# Altium PCB pcb_4_layer.PcbDoc
Units mil, origin at the board's own origin, x right, y up, seen from the top; angles counter-clockwise.
Board outline 1900 x 2500 mil, 4 copper layers (Top Layer, Mid Layer 1, Mid Layer 2, Bottom Layer), stack 61.811 mil thick; 45 components, 35 nets, 200 pads, 30 vias.
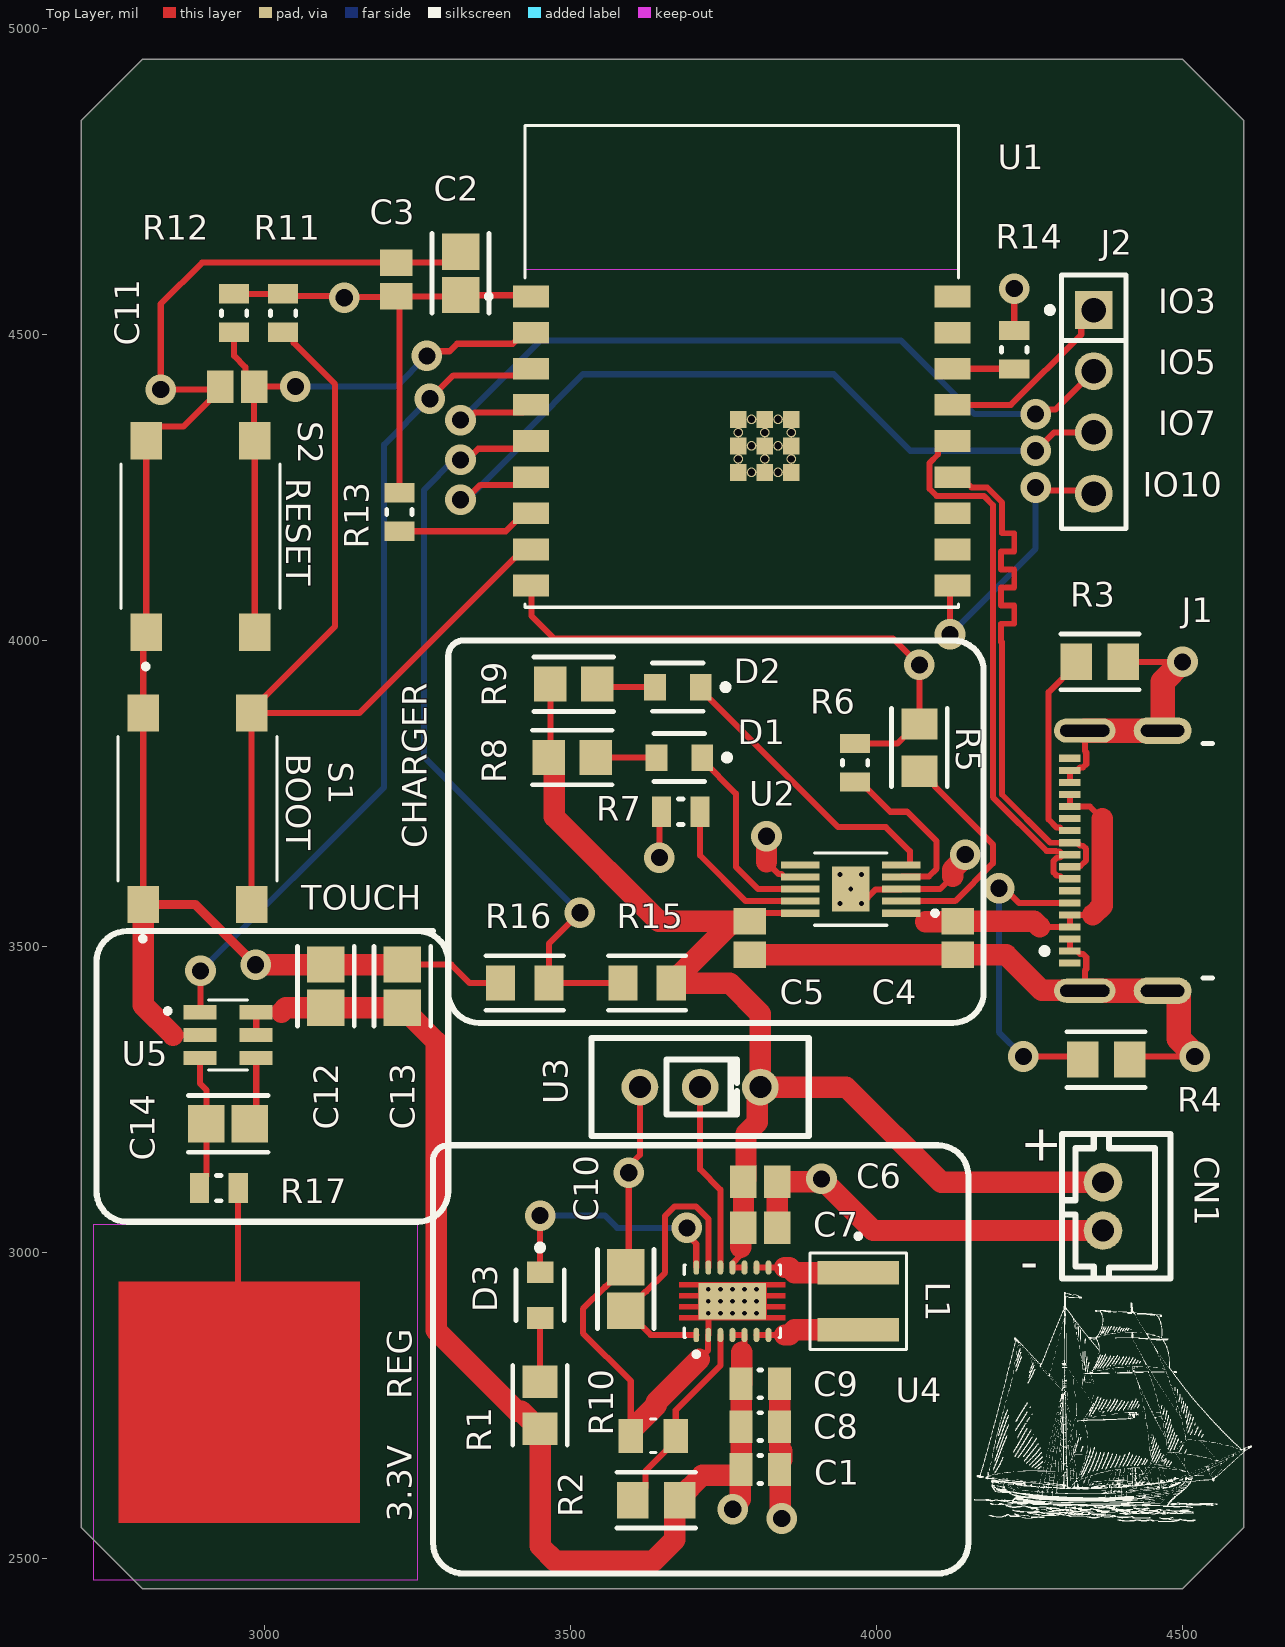
[diagram p0: Top Layer view]
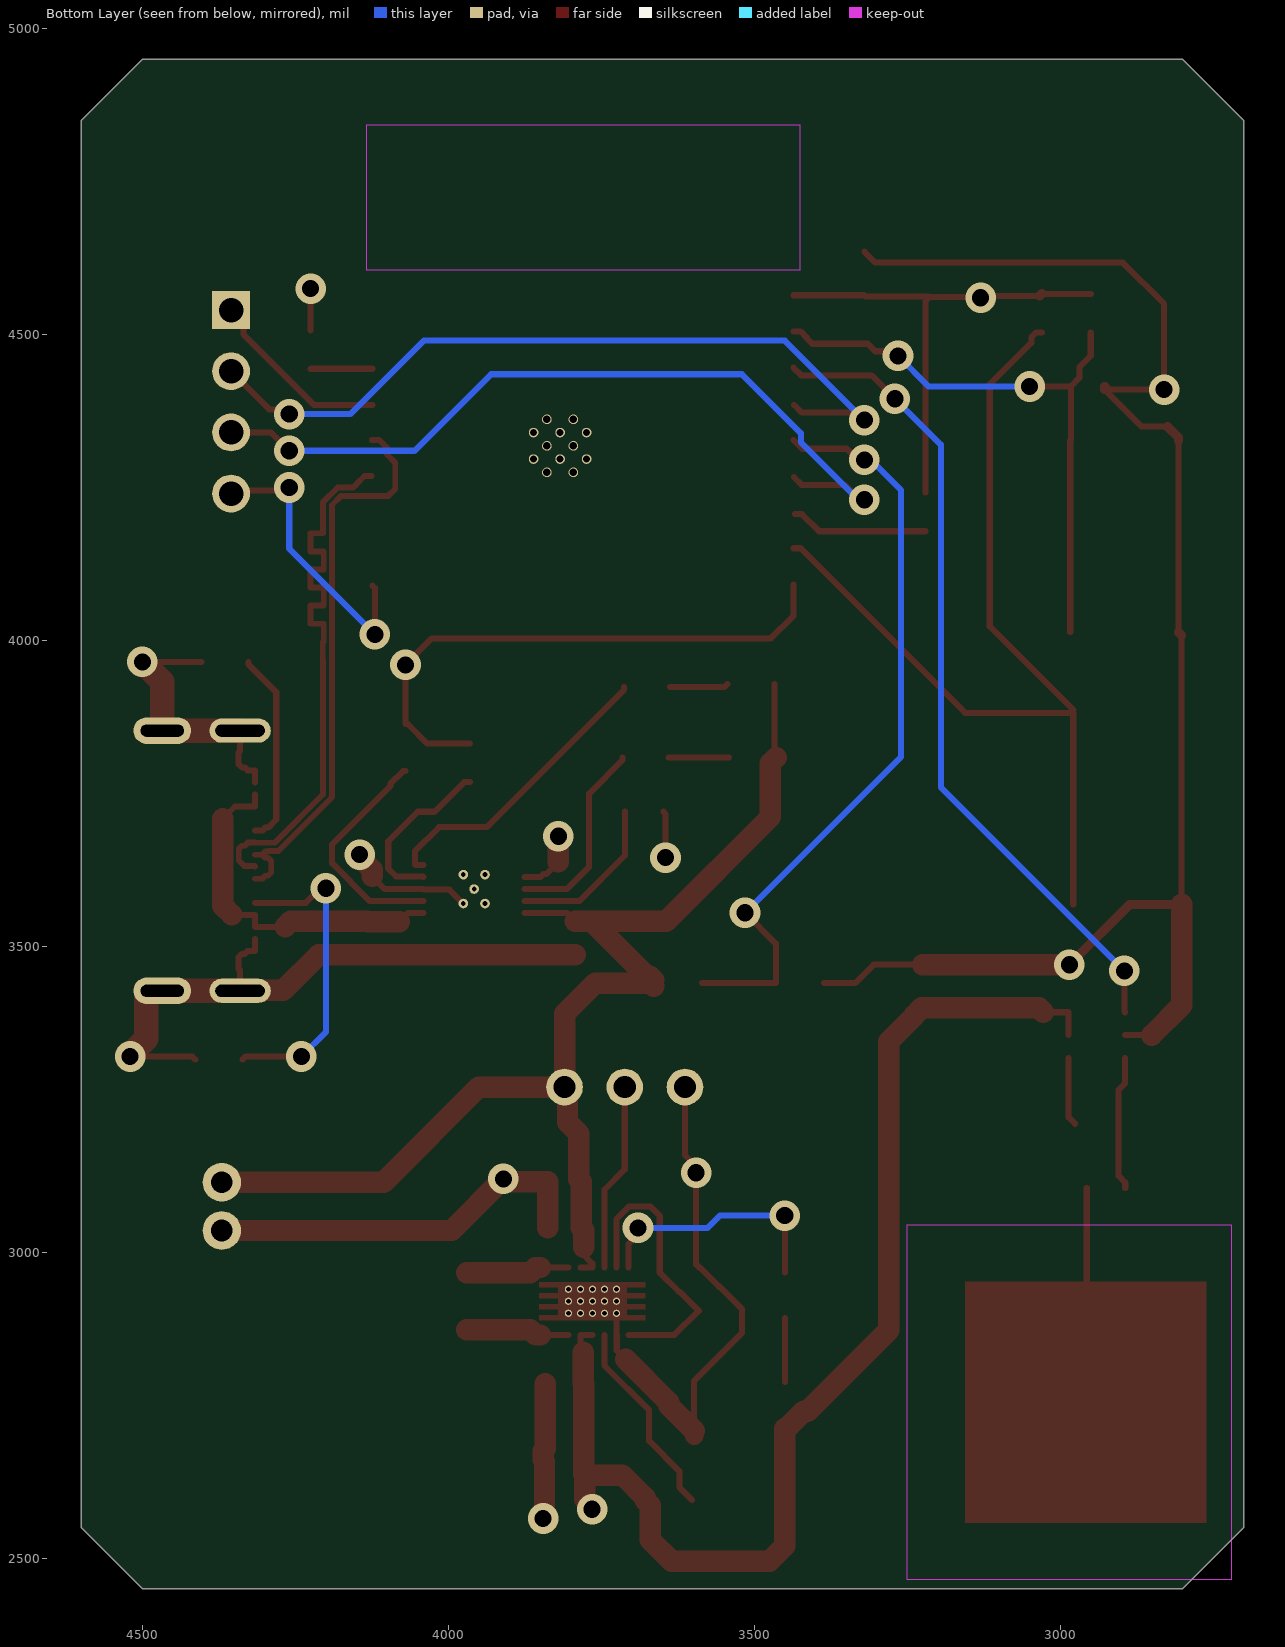
[diagram p1: Bottom Layer view, seen from below]
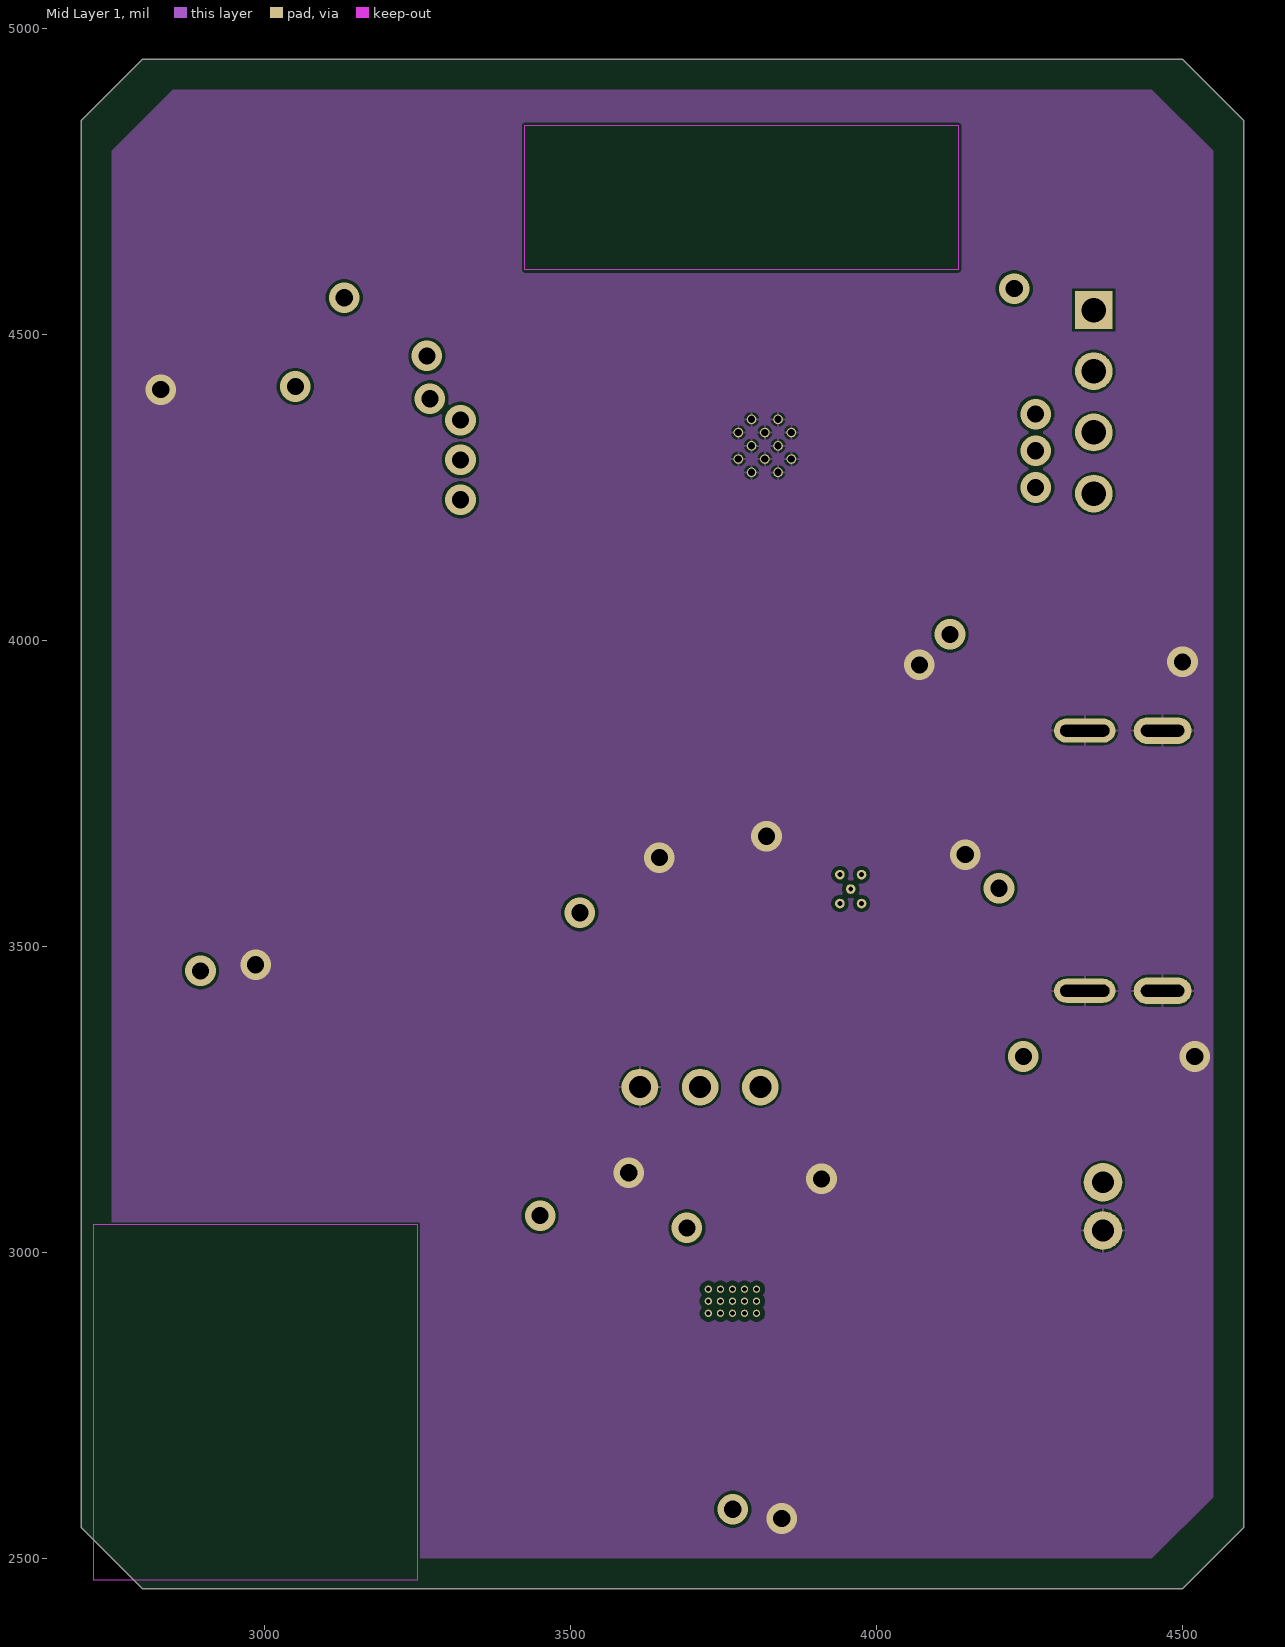
[diagram p2: Mid Layer 1]
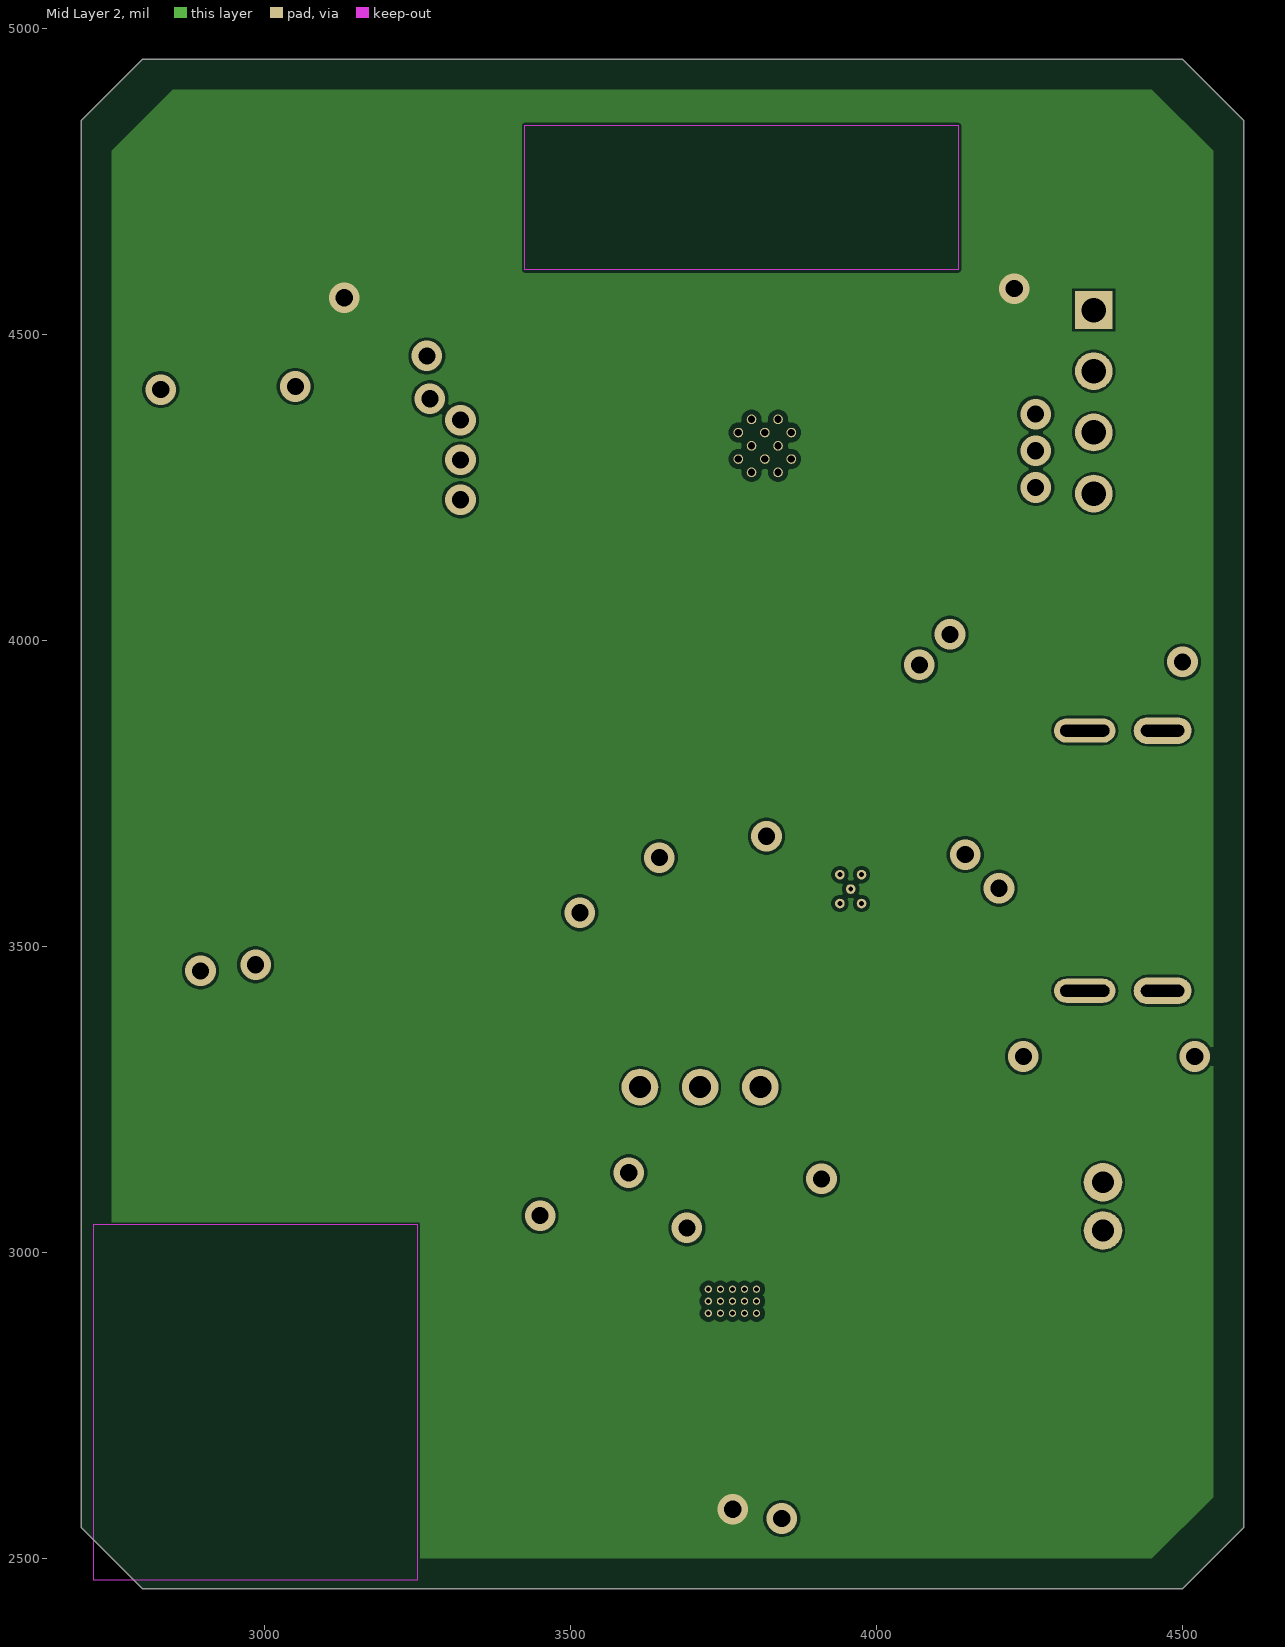
[diagram p3: Mid Layer 2]
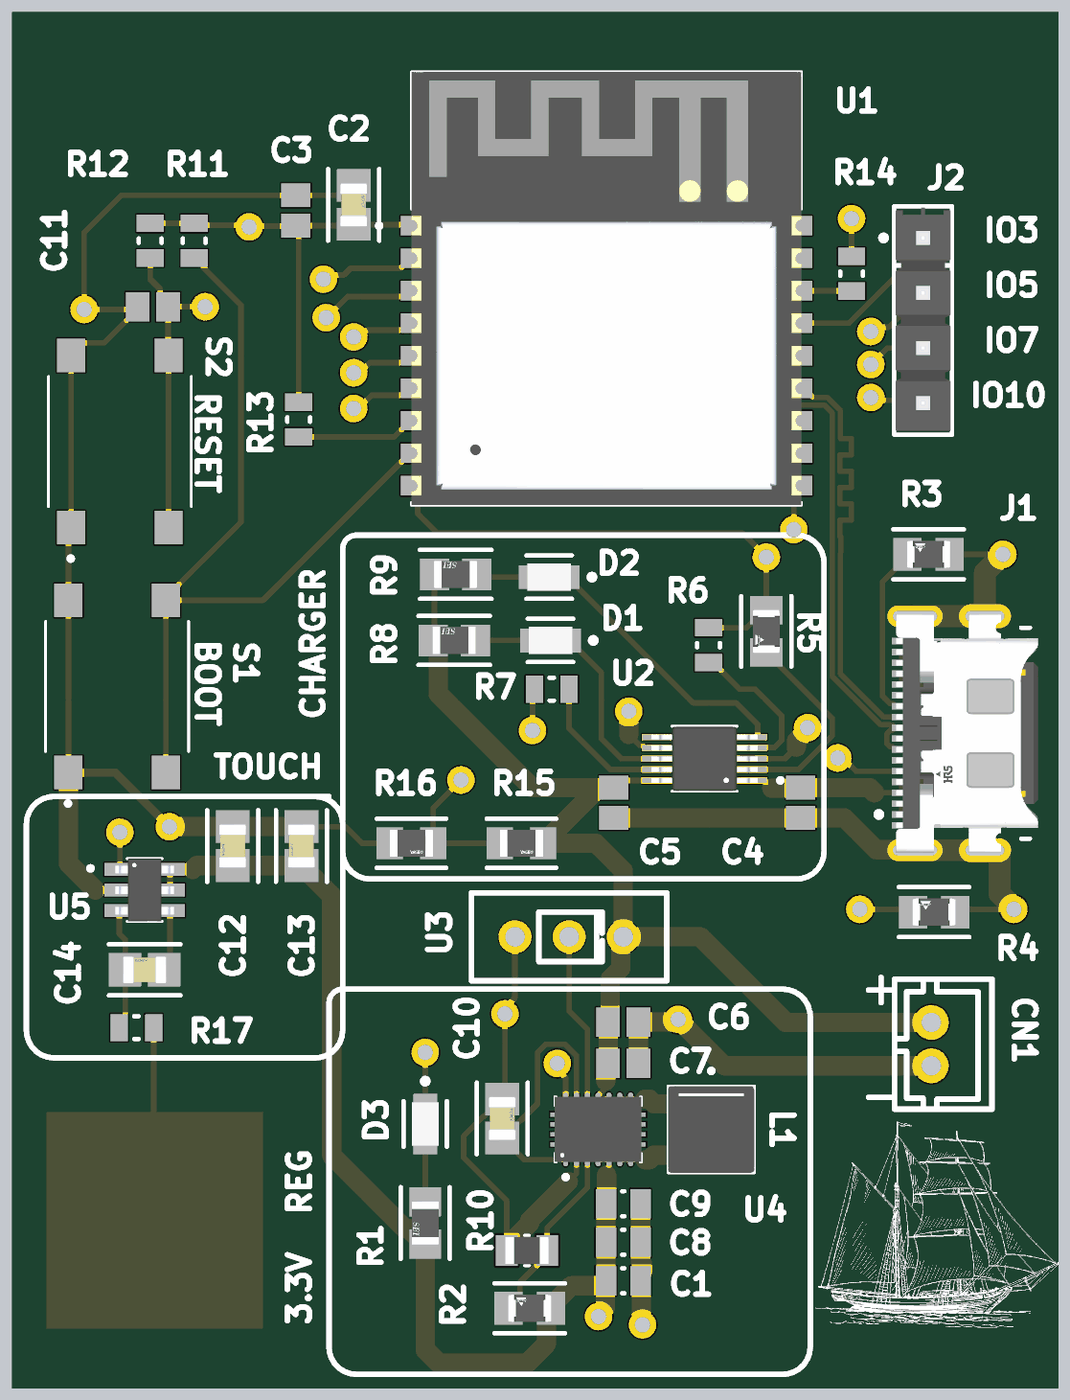
[diagram p4: 3D render of the assembled board from above, using the file's embedded part models]

## Layer stack, top to bottom
Top Solder: solder mask 0.5, Solder Resist, Dk 3.8
Top Layer: signal copper 1.378
Dielectric 1: prepreg 7.874, 7628, Dk 4.6
Mid Layer 1: signal copper 0.689
Core: core 41.9291, FR-4, Dk 4.5
Mid Layer 2: signal copper 0.689
Dielectric 2: prepreg 7.874, 7628, Dk 4.6
Bottom Layer: signal copper 1.378
Bottom Solder: solder mask 0.5, Solder Resist, Dk 3.8

## Board outline
4600,2550 4500,2450 2800,2450 2700,2550 2700,4850 2800,4950 4500,4950 4600,4850

## Design rules (kind name [scope] priority, off if disabled: settings)
BoardOutlineClearance [All] p1: gap=7.87 ignorepadtopadclearanceinfootprint=FALSE
Clearance [All] p1: gap=4 ignorepadtopadclearanceinfootprint=FALSE except(5: Arc-Via Track-Via SMDPad-Via THPad-Via Via-Via Via-Fill Via-Poly Via-Region Via-Text; 9.84: Arc-Hole Track-Hole SMDPad-Hole THPad-Hole Via-Hole Fill-Hole Poly-Hole Region-Hole Text-Hole)
ComponentClearance [All] p1: gap=4 collisioncheckmode=3 verticalgap=4 showdistances=TRUE
DiffPairsRouting [All] p1: maxlimit=4 minlimit=4 mostfreqgap=4 toplayer_minwidth=4 toplayer_maxwidth=71497.94 toplayer_prefwidth=4 midlayer1_minwidth=4 midlayer1_maxwidth=71497.94 midlayer1_prefwidth=4 midlayer2_minwidth=4 midlayer2_maxwidth=71497.94 midlayer2_prefwidth=4 bottomlayer_minwidth=4 bottomlayer_maxwidth=71497.94 bottomlayer_prefwidth=4 maxuncoupledlength=500
Height [All] p1: minheight=0 maxheight=71497.94 prefheight=500
HoleSize [All] p1: absolutevalues=TRUE maxlimit=248.03 minlimit=7.87 maxpercent=80.000 minpercent=20.000
HoleToHoleClearance [All] p1: gap=9.84 allowstackedmicrovias=FALSE
MinimumAnnularRing [All] p1: minimumring=3
MinimumSolderMaskSliver [All] p1: minsoldermaskwidth=0
PlaneClearance [All] p1: clearance=4
PlaneConnect PlaneConnectPowerPads [InPadClass('PowerPads')] p1: planeconnectstyle=Direct reliefexpansion=20 reliefentries=4 reliefconductorwidth=10 reliefairgap=10
PlaneConnect [All] p2: pad.planeconnectstyle=Relief pad.reliefexpansion=11.81 pad.reliefentries=4 pad.reliefconductorwidth=4 pad.reliefairgap=4 via.planeconnectstyle=Direct via.reliefexpansion=11.81 via.reliefentries=4 via.reliefconductorwidth=5 via.reliefairgap=5
PolygonConnect PolygonConnectPowerPads [All vs (InPadClass('PowerPads'))] p1: connectstyle=Direct reliefconductorwidth=10 reliefentries=4 polygonreliefangle="90 Angle" airgapwidth=10
PolygonConnect [All] p2: thpad.connectstyle=Relief thpad.reliefconductorwidth=4 thpad.reliefentries=4 thpad.polygonreliefangle="90 Angle" thpad.airgapwidth=4 smdpad.connectstyle=Relief smdpad.reliefconductorwidth=4 smdpad.reliefentries=4 smdpad.polygonreliefangle="90 Angle" smdpad.airgapwidth=4 via.connectstyle=Direct via.reliefconductorwidth=5 via.reliefentries=4 via.polygonreliefangle="90 Angle" via.airgapwidth=5
RoutingVias [All] p1: holewidth=7.87 width=17.72 viastyle="Through Hole" minholewidth=7.87 minwidth=17.72 maxholewidth=248.03 maxwidth=257.87
SilkToSilkClearance [All] p1: silktosilkclearance=0
SilkToSolderMaskClearance [IsPad] p1: minsilkscreentomaskgap=4 clearancetoexposedcopper=TRUE
SolderMaskExpansion [All] p1: expansion=2.95 istentingtop=FALSE
SupplyNets "Schematic Supply Nets_3" [InNet('+5V')] p1: voltage=0.000
SupplyNets "Schematic Supply Nets_2" [InNet('REG_VIN')] p2: voltage=0.000
SupplyNets "Schematic Supply Nets_1" [InNet('GND')] p3: voltage=0.000
SupplyNets "Schematic Supply Nets" [InNet('REG_VOUT')] p4: voltage=0.000
Width [All] p1: maxlimit=71497.94 minlimit=4 preferedwidth=4
20 further rules are at their usual default settings.

## Components (designator, comment, footprint, x,y, rotation, side; value= is the part's Value field where it differs from the comment)
C1 "CAP 22uF 6.3V 0805(2012)" CAPC0805(2012)145_L 3810,2645 r0 top value=22uF
C2 "C0805C104J4RACTU" FP-C0805C-DN-IPC_A 3320,4600 r270 top value="0.10 μF"
C3 "C0805C106M9PACTU" CAPC2013X145X50LL20T25 3215,4590 r90 top
C4 "C0805C105J4RACTU" CAPC2013X140X50LL20T25 4132.72,3513.62 r90 top
C5 "C0805C105J4RACTU" CAPC2013X140X50LL20T25 3792.72,3513.62 r90 top
C6 "C0805C106M9PACTU" CAPC2013X145X50LL20T25 3810,3115 r180 top
C7 "C0805C106M9PACTU" CAPC2013X145X50LL20T25 3810,3040 r180 top
C8 "CAP 22uF 6.3V 0805(2012)" CAPC0805(2012)145_L 3810,2715 r0 top value=22uF
C9 "CAP 22uF 6.3V 0805(2012)" CAPC0805(2012)145_L 3810,2785 r0 top value=22uF
C10 "C0805C104J4RACTU" FP-C0805C-DN-IPC_A 3590,2940 r270 top value="0.10 μF"
C11 "C0805C106M9PACTU" CAPC2013X145X50LL20T25 2955,4415 r0 top
C12 "C0805C104J4RACTU" FP-C0805C-DN-IPC_A 3100,3435 r90 top value="0.10 μF"
C13 "C0805C104J4RACTU" FP-C0805C-DN-IPC_A 3225,3435 r90 top value="0.10 μF"
C14 "C0805C103K5RACTU" FP-C0805C-DN-IPC_A 2940,3210 r0 top value="10,000 pF"
CN1 "b2b-ph-k-s(lf)(sn)" CONN-TH_B2B-PH-K-S 4370,3075 r270 top
D1 "SML-LXT0805IW-TR" FP-SML-LXT0805IW-TR-MFG 3677.72,3808.62 r180 top
D2 "SML-LXT0805IW-TR" FP-SML-LXT0805IW-TR-MFG 3675.31,3923.62 r180 top
D3 "SML-LXT0805IW-TR" FP-SML-LXT0805IW-TR-MFG 3450,2930 r270 top
J1 "CX90M-16P" FP-CX90M-16P-MFG 4435,3640 r90 top
J2 "TSW-104-23-T-S" FP-TSW-104-23-T-S-MFG 4355,4390 r270 top
L1 "XFL4020-152MEC" IND_XFL4020-152MEC 3970,2920 r270 top
R1 "RMCF0805JG1K50" FP-RMCF0805-IPC_A 3450,2750 r270 top
R2 "CRCW08051M00JNEAHP" FP-CRCW0805-HPe3-IPC_A 3640,2595 r0 top
R3 "CRCW08055K10JNEAHP" FP-CRCW0805-HPe3-IPC_A 4365,3965 r0 top
R4 "CRCW08055K10JNEAHP" FP-CRCW0805-HPe3-IPC_A 4375,3315 r0 top
R5 "CRCW08052K20JNEAHP" FP-CRCW0805-HPe3-IPC_A 4070,3825 r90 top
R6 "RC0805FR-1010KL" RESC2013X60X35LL10T20 3965,3800 r270 top
R7 "RC0805FR-1010KL" RESC2013X60X35LL10T20 3680,3720 r0 top
R8 "RMCF0805JG1K50" FP-RMCF0805-IPC_A 3502.72,3808.62 r180 top
R9 "RMCF0805JG1K50" FP-RMCF0805-IPC_A 3505.31,3928.62 r180 top
R10 "CRGCQ0805F180K" RESC2012X65N 3635,2700 r0 top
R11 "RC0805FR-1010KL" RESC2013X60X35LL10T20 3030,4535 r270 top
R12 "RC0805FR-1010KL" RESC2013X60X35LL10T20 2950,4535 r270 top
R13 "RC0805FR-1010KL" RESC2013X60X35LL10T20 3220,4210 r90 top
R14 "RC0805FR-1010KL" RESC2013X60X35LL10T20 4225,4475 r90 top
R15 "AT0805BRD07100KL" FP-AT0805-IPC_A 3625,3440 r0 top
R16 "AT0805BRD07100KL" FP-AT0805-IPC_A 3425,3440 r0 top
R17 "RC0805FR-1010KL" RESC2013X60X35LL10T20 2925,3105 r180 top
S1 "B3S-1000P" SW_B3S-1000P 2890,3725 r90 top
S2 "B3S-1000P" SW_B3S-1000P 2895,4170 r90 top
U1 "ESP32-C3-WROOM-02-N4" MODULE_ESP32-C3-WROOM-02-H4 3779.49,4447.99 r0 top
U2 "BQ24090DGQR" IC_XTR111AIDGQR 3957.72,3593.62 r180 top
U3 "ss-12d00-g3" SW-TH_3P-L8.8-W3.9-P2.50_SS12D00G3 3711.6,3270 r180 top
U4 "TPS63020DSJT" IC_TPS63020DSJT 3764.37,2920 r90 top
U5 "AT42QT1010-TSHR" SOT95P270X145-6N 2940,3355 r0 top

## Footprints (in the part's own frame and the unit in brackets; to place one, negate y for a bottom-side part, rotate by r counter-clockwise, add the part's x,y. Pads: shape width x height; smd on the part's side, far side on the other; paste and mask are expansions set on the pad)
CAPC0805(2012)145_L [mm] "Chip Capacitor, Body 2.0x1.2mm, Height 1.45mm, IPC High Density"
  rect 0.95x1.35 smd: 1(-0.8,0) 2(0.8,0)
  silkscreen extent -0.05,-0.58 0.05,0.58, body extent -1.1,-0.72 1.1,0.72, height 1.45
CAPC2013X140X50LL20T25 [mm] "Chip Capacitor, 2-Leads, Body 2.00x1.25mm, IPC High Density"
  rect 1.1x1.35 smd: 1(-0.7,0) 2(0.7,0)
  body extent -1.1,-0.72 1.1,0.72, height 1.4
CAPC2013X145X50LL20T25 [mm] "Chip Capacitor, 2-Leads, Body 2.00x1.25mm, IPC High Density"
  rect 1.1x1.35 smd: 1(-0.7,0) 2(0.7,0)
  body extent -1.1,-0.72 1.1,0.72, height 1.45
CONN-TH_B2B-PH-K-S [mil]
  round 63 hole 35.4: 1(39.4,0) 2(-39.4,0)
  silkscreen extent -118,-67 118,110
FP-AT0805-IPC_A [mil]
  rect 47.56x57.56 smd paste+0 mask+0: 1(-39.45,0) 2(39.45,0)
  silkscreen extent -63,-45 63,45, body extent -83,-48 83,48, height 10
FP-C0805C-DN-IPC_A [mil]
  rect 59.24x61.27 smd paste+0 mask+0: 1(-35.46,0) 2(35.46,0)
  silkscreen extent -65,-46 65,46, body extent -85,-50 85,50, height 10
FP-CRCW0805-HPe3-IPC_A [mil]
  rect 51.42x59.38 smd paste+0 mask+0: 1(-38.43,0) 2(38.43,0)
  silkscreen extent -64,-45 64,45, body extent -84,-49 84,49, height 10
FP-CX90M-16P-MFG [mm]
  rect 0.3x0.9 smd paste+0 mask+0: 1(-4.25,3.025) 2(4.25,3.025) A1(-3.75,3.025) A4(-2.75,3.025) A5(-1.75,3.025) A6(-0.75,3.025) A7(0.75,3.025) A8(1.75,3.025) A9(2.75,3.025) A12(3.75,3.025) B1(3.25,3.025) B4(2.25,3.025) B5(1.25,3.025) B6(0.25,3.025) B7(-0.25,3.025) B8(-1.25,3.025) B9(-2.25,3.025) B12(-3.25,3.025)
  rrect100% 1x2.55 hole 2.05 slot 0.5 at 0 deg paste-2539.97 mask+0: 3(-5.4,2.405) 4(5.4,2.405)
  rrect100% 1.1x2.4 hole 1.8 slot 0.5 at 0 deg paste-2539.97 mask+0: 5(-5.4,-0.825) 6(5.4,-0.825)
  silkscreen extent -4.87,-2.9 4.87,4.2, body extent -6.05,-3.37 6.05,3.78, height 0.25
FP-RMCF0805-IPC_A [mil]
  rect 53.33x57.56 smd paste+0 mask+0: 1(-38.42,0) 2(38.42,0)
  silkscreen extent -65,-45 65,45, body extent -85,-48 85,48, height 10
FP-SML-LXT0805IW-TR-MFG [mm]
  rect 0.9x1.1 smd paste+0 mask+0: 1(-0.95,0) 2(0.95,0)
  silkscreen extent -2.1,-1 1.05,1, body extent -1.5,-0.8 1.5,0.8, height 0.25
FP-TSW-104-23-T-S-MFG [mm]
  rect 1.57x1.57 hole 1.02 paste-2539.97 mask+0: 1(-3.81,0)
  round 1.57 hole 1.02 paste-2539.97 mask+0: 2(-1.27,0) 3(1.27,0) 4(3.81,0)
  silkscreen extent -5.27,-1.95 5.27,1.34, body extent -5.37,-1.44 5.37,1.44, height 0.25
IC_TPS63020DSJT [mm]
  oval 0.6x0.24 smd mask+0: 1(-1.4,1.5) 2(-1.4,1) 3(-1.4,0.5) 4(-1.4,0) 5(-1.4,-0.5) 6(-1.4,-1) 7(-1.4,-1.5) 8(1.4,-1.5) 9(1.4,-1) 10(1.4,-0.5) 11(1.4,0) 12(1.4,0.5) 13(1.4,1) 14(1.4,1.5)
  rect 1.5x2.8 smd paste-2 mask+0: 15(0,0)
  round 0.3 hole 0.2: 16(-0.5,1) 17(0,1) 18(0.5,1) 19(-0.5,0.5) 20(0,0.5) 21(0.5,0.5) 22(-0.5,0) 23(0,0) 24(0.5,0) 25(-0.5,-0.5) 26(0,-0.5) 27(0.5,-0.5) 28(-0.5,-1) 29(0,-1) 30(0.5,-1)
  Top Layer region: 0.79,-2.2 0.59,-2.2 0.59,-1.425 0.33,-1.425 0.33,-2.2 0.13,-2.2 0.13,-1.425 -0.13,-1.425 -0.13,-2.2 -0.33,-2.2 -0.33,-1.425 -0.59,-1.425 -0.59,-2.2 -0.79,-2.2 -0.79,2.2 -0.59,2.2 -0.59,1.425 -0.33,1.425 -0.33,2.2 -0.13,2.2 -0.13,1.425 0.13,1.425 0.13,2.2 0.33,2.2 0.33,1.425 0.59,1.425 0.59,2.2 0.79,2.2
  silkscreen extent -2.3,-2 1.5,2, body extent -1.5,-2 1.5,2, height 1
IC_XTR111AIDGQR [mm]
  rect 1.6x0.3 smd paste-0.025 mask+0.05: 1(-2.1,1) 2(-2.1,0.5) 3(-2.1,0) 4(-2.1,-0.5) 5(-2.1,-1) 6(2.1,-1) 7(2.1,-0.5) 8(2.1,0) 9(2.1,0.5) 10(2.1,1)
  rect 1.57x1.88 smd: 11(0,0)
  round 0.4 hole 0.2 mask+0: 12(-0.45,0.6) 13(0.45,0.6) 14(0,0) 15(-0.45,-0.6) 16(0.45,-0.6)
  silkscreen extent -3.6,-1.5 1.5,1.5, body extent -2.45,-1.5 2.45,1.5, height 1.1
IND_XFL4020-152MEC [mm]
  rect 0.98x3.4 smd: 1(-1.185,0) 2(1.185,0)
  silkscreen extent -2.8,-2 2,2, body extent -2,-2 2,2, height 2.1
MODULE_ESP32-C3-WROOM-02-H4 [mm]
  rect 1.5x0.9 smd: 1(-8.75,2.9) 2(-8.75,1.4) 3(-8.75,-0.1) 4(-8.75,-1.6) 5(-8.75,-3.1) 6(-8.75,-4.6) 7(-8.75,-6.1) 8(-8.75,-7.6) 9(-8.75,-9.1) 10(8.75,-9.1) 11(8.75,-7.6) 12(8.75,-6.1) 13(8.75,-4.6) 14(8.75,-3.1) 15(8.75,-1.6) 16(8.75,-0.1) 17(8.75,1.4) 18(8.75,2.9)
  rect 0.7x0.7 smd: 19(-0.14,-2.2) 20(0.96,-2.2) 21(2.06,-2.2) 22(-0.14,-3.3) 23(0.96,-3.3) 24(2.06,-3.3) 25(-0.14,-4.4) 26(0.96,-4.4) 27(2.06,-4.4)
  round 0.4 hole 0.3 mask+0: 28(0.41,-2.2) 29(1.51,-2.2) 30(-0.14,-2.75) 31(0.96,-2.75) 32(2.06,-2.75) 33(0.41,-3.3) 34(1.51,-3.3) 35(-0.14,-3.85) 36(0.96,-3.85) 37(2.06,-3.85) 38(0.41,-4.4) 39(1.51,-4.4)
  Keep-Out Layer region: 9,4 -9,4 -9,10 9,10
  Keep-Out Layer region: 9,4 -9,4 -9,10 9,10
  silkscreen extent -10.6,-10 9,10, body extent -9,-10 9,10, height 3.35
RESC2012X65N [mm]
  rect 1x1.42 smd paste+0 mask+0.102: 1(-0.935,0) 2(0.935,0)
  silkscreen extent -0.12,-0.7 0.12,0.7, body extent -1,-0.63 1,0.63, height 0.65
RESC2013X60X35LL10T20 [mm] "Chip Resistor, 2-Leads, Body 2.00x1.25mm, IPC High Density"
  rect 0.8x1.25 smd: 1(-0.8,0) 2(0.8,0)
  silkscreen extent -0.1,-0.53 0.1,0.53, body extent -1.05,-0.67 1.05,0.67, height 0.6
SOT95P270X145-6N [mm]
  rect 1.37x0.59 smd: 1(-1.17,0.95) 2(-1.17,0) 3(-1.17,-0.95) 4(1.17,-0.95) 5(1.17,0) 6(1.17,0.95)
  silkscreen extent -2.6,-1.45 0.81,1.45, body extent -1.35,-1.45 1.35,1.45, height 1.45
SW-TH_3P-L8.8-W3.9-P2.50_SS12D00G3 [mil]
  round 60 hole 36 paste-99999 mask+2: 1(-98.4,0) 2(0,0) 3(98.4,0)
  silkscreen extent -178,-80 178,80
SW_B3S-1000P [mm]
  rect 1.55x1.3 smd: 1(-3.975,2.25) 2(3.975,2.25) 3(-3.975,-2.25) 4(3.975,-2.25)
  silkscreen extent -5.5,-3.3 3,3.3

## Part data
C1 C8 C9: library part CMP-1036-04938-1, "CAP 22uF 6.3V ±10% 0805 (2012 Metric) Thickness 1.45mm SMD", Case-EIA=0805, Case-Metric=2012, Rated Voltage="6.3 V", Tolerance=Â±10%, Max Thickness="1.45 mm", Technology=SMT
C2 C10 C12 C13: library part CMP-2007-01112-2, "CAP CER 0.1UF 16V X7R 0805", Capacitance="0.10 μF", Manufacturer=KEMET, Package=C0805C-DN, Temperature="-55°C to +125°C", Temperature Characteristic=X7R, Temperature Coefficient=30ppm/°C, Temperature Range High=+125°C, Temperature Range Low=-55°C, Tolerance=0.05, Voltage Rating="16 V", Automotive=No, Category=Cap, ComponentLink2Description=Datasheet, ComponentLink2URL=https://content.kemet.com/datasheets/KEM_C1003_C0G_SMD.pdf, Device Class L1="Passive Components", Device Class L2=Capacitors, Device Class L3="Ceramic Capacitors", Digikey Description="CAP CER 0.1UF 16V X7R 0805", Height=0.88mm, Ipc Land Pattern Name=CAPC200125X78, Lead Free=Yes, Manufacturer Part Number=C0805C104J4RACTU, Material=Ceramic, Mouser Description="Multilayer Ceramic Capacitors MLCC - SMD/SMT 16volts 0.1uF X7R 5%", Octopart=https://octopart.com/c0805c104j4ractu-kemet-12563748, RoHS=TRUE
C3 C6 C7 C11: library part CMP-1036-04919-2, "CAP CER 10UF 6.3V X5R 0805", Manufacturer=Kemet, Part Number=C0805C106M9PACTU
C4 C5: library part CMP-2007-03229-1, "1 µF ±5% 16V Ceramic Capacitor X7R 0805 (2012 Metric)", Manufacturer=Kemet, Part Number=C0805C105J4RACTU
C14: library part CMP-2007-01079-2, "CAP CER 10000PF 50V X7R 0805", Capacitance="10,000 pF", Manufacturer=KEMET, Package=C0805C-DN, Temperature="-55°C to +125°C", Temperature Characteristic=X7R, Temperature Coefficient=30ppm/°C, Temperature Range High=+125°C, Temperature Range Low=-55°C, Tolerance=0.1, Voltage Rating="50 V", Automotive=No, Category=Cap, ComponentLink2Description=Datasheet, ComponentLink2URL=https://content.kemet.com/datasheets/KEM_C1003_C0G_SMD.pdf, Device Class L1="Passive Components", Device Class L2=Capacitors, Device Class L3="Ceramic Capacitors", Digikey Description="CAP CER 10000PF 50V X7R 0805", Height=0.88mm, Ipc Land Pattern Name=CAPC200125X78, Lead Free=Yes, Manufacturer Part Number=C0805C103K5RACTU, Material=Ceramic, Octopart=https://octopart.com/c0805c103k5ractu-kemet-90536, RoHS=TRUE
CN1: "Pins Structure:1x2P Pitch:2mm Mounting Type:Through Hole Reference Series:PH Number of Pins:2P Number of Rows:1 Number of PINs Per Row:2 Row Spacing:- Current Rating:2A Contact Material:Brass Contact Plating:Tin Operating Temperature:-25℃~+85℃ Operating T", Color=White, Current Rating=2A, Flame Retardant Rating=UL94V-0, JLCPCB Part Class="Extended Part", LCSC Part Name="1x2P 间距:2mm 直插 系列:PH", Manufacturer=JST, ManufacturerPart=B2B-PH-K-S(LF)(SN), Operating Temperature=-25℃~+85℃, Voltage Rating=100V, AddInBom=yes, Contact Material=Brass, Contact Plating=Tin, ConvertToPcb=yes, Datasheet=https://item.szlcsc.com/datasheet/B2B-PH-K-S(LF)(SN)/142630.html, FootprintName=CONN-TH_B2B-PH-K-S, ModelId=5cc63648eb1041ff813a836ee0942c91, ModelName=CONN-TH_PH2.00-LI-2P, ModelTransform=236.25937,181.102,0,180,0,0,0,23.622,-137.795, Mounting Type="Through Hole", Number of Pins=2P, Number of PINs Per Row=2, Number of Rows=1, Pins Structure=1x2P, Pitch=2mm, Plastic Material=PA66, Reference Series=PH, Row Spacing=-, Supplementary Features="K Pin", Supplier=LCSC, Supplier Footprint=插件,P=2mm, SupplierPart=C131337, Symbol=B2B-PH-K-S(LF)(SN), X-Length of Bottom Edge on Board (Spacing Line)=5.9mm, Y-Width of Bottom Edge on Board=4.5mm, Z-Height of the Board=6mm
D1 D2 D3: library part CMP-1724-00002-2, "LED RED DIFFUSED SMD", Case Code (Imperial)=0805, Case Code (Metric)=2012, Color=Red, Forward Current=20mA, Forward Voltage=2V, Lens Color=White, Max Operating Temperature=80°C, Min Operating Temperature=-25°C, Package Quantity=1, Approvals=UL, Case/Package=0805, Dominant Wavelength=635nm, Height=0.8mm, Illumination Color=Red, Lead Free="Lead Free", Length=2mm, Lens Style=Rectangular, Lens Transparency=Diffused, Luminous Intensity=11mcd, Mount="Surface Mount", Number of LEDs=1, Number of Pins=2, Packaging="Tape and Reel", REACH SVHC="No SVHC", Test Current=20mA, Viewing Angle=140°, Wavelength=635nm, Width=1.25mm
J1: library part CMP-11601-000005-1, "CONN RCPT USB2.0 TYPEC 16POS SMD", Current Rating=1.25A, Flammability Rating="UL94 V-0", Insulation Color=Black, Max Operating Temperature=85°C, Min Operating Temperature=-30°C, Connector Type=USB, Contact Plating=Gold, Gender=Receptacle, Mating Cycles=10000, Mount="Surface Mount", Number of Contacts=16, Number of Ports=1, Packaging="Cut Tape", Shielding=Shielded, Termination=Solder
J2: library part CMP-02766-001388-1, "CONN HEADER VERT 4POS 2.54MM", Color=Black, Max Current Rating=7.6A, Max Operating Temperature=105°C, Max Voltage Rating (AC)=550V, Min Operating Temperature=-55°C, Package Quantity=1, Connector Type="Male Pin", Contact Material=Bronze, Contact Mating Length=0.23inch, Contact Plating=Tin, Contact Type="Male Pin", Depth=2.54mm, Gender=Male, Housing Color=Black, Housing Material=Polyester, Lead Free="Lead Free", Length=10.16mm, Mount="Through Hole", Number of Contacts=4, Number of Positions=4, Number of Rows=1, Orientation=Straight, Packaging=Bulk, Pitch=2.54mm, Radiation Hardening=No, REACH SVHC="No SVHC", RoHS Compliant=Yes, Series=TSW, Termination=Solder, Width=2.54mm
L1: "Inductor Power Shielded Wirewound 1.5uH 20% 100KHz 9.1A 15.8mOhm DCR 1515 Automotive Embossed Plastic T/R", Package=None, Check_prices=https://www.snapeda.com/parts/XFL4020-152MEC/Coilcraft/view-part/?ref=eda, MF=Coilcraft, MP=XFL4020-152MEC, SnapEDA_Link=https://www.snapeda.com/parts/XFL4020-152MEC/Coilcraft/view-part/?ref=snap
R1 R8 R9: library part CMP-26527-004339-1, "1.5kΩ ±5% 0.125W 0805 Thick Film Chip Resistor AEC-Q200 compliant", Case/Package=0805, Max Operating Temperature=155°C, Max Power Dissipation=125mW, Min Operating Temperature=-55°C, Resistance=1.5kR, Resistor Type="Thick Film", Temperature Coefficient=200ppm/°C, Tolerance=5%, Contact Plating=Tin, Features="Automotive AEC-Q200", Height=0.026inch, Length=0.079inch, Mount="Surface Mount", Number of Terminations=2, Packaging="Tape and Reel", Radiation Hardening=No, RoHS Compliant=Yes, Series=RMCF, Width=0.049inch
R2: library part CMP-02407-004826-1, "RES Thick Film, 1MΩ, 5%, 0.5W, 200ppm/°C, 0805", Case Code (Imperial)=0805, Case Code (Metric)=2012, Max Operating Temperature=155°C, Max Power Dissipation=333mW, Min Operating Temperature=-55°C, Package Quantity=1, Power Rating=330mW, Resistance=1MR, Temperature Coefficient=200ppm/°C, Tolerance=5%, Voltage Rating=150V, Case/Package=0805, Composition="Thick Film", Contact Plating=Tin, Features="Automotive AEC-Q200", Height=0.024inch, Lead Free="Lead Free", Length=0.079inch, Number of Terminations=2, Packaging="Tape and Reel", Radiation Hardening=No, Termination=SMD/SMT, Weight=0.000194oz, Width=0.049inch
R3 R4: library part CMP-02407-002962-1, "RES Thick Film, 5.1kΩ, 5%, 0.5W, 200ppm/°C, 0805", Case/Package=0805, Max Operating Temperature=155°C, Max Power Dissipation=500mW, Min Operating Temperature=-55°C, Package Quantity=5000, Resistance=5.1kR, Temperature Coefficient=200ppm/°C, Tolerance=5%, Composition="Thick Film", Features="Automotive AEC-Q200", Height=0.024inch, Lead Free="Lead Free", Length=0.079inch, Number of Terminations=2, Packaging="Tape and Reel", Width=0.049inch
R5: library part CMP-02407-006246-1, "RES Thick Film, 2.2kΩ, 5%, 0.5W, 200ppm/°C, 0805", Case Code (Imperial)=0805, Case Code (Metric)=2012, Max Operating Temperature=155°C, Max Power Dissipation=333mW, Min Operating Temperature=-55°C, Package Quantity=1, Power Rating=500mW, Resistance=2.2kR, Temperature Coefficient=200ppm/°C, Tolerance=5%, Voltage Rating=150V, Case/Package=0805, Composition="Thick Film", Contact Plating=Tin, Features="Automotive AEC-Q200", Height=0.024inch, Lead Free="Lead Free", Length=0.079inch, Number of Terminations=2, Packaging="Tape and Reel", Radiation Hardening=No, Termination=SMD/SMT, Weight=0.000194oz, Width=0.049inch
R6 R7 R11 R12 R13 R14 R17: library part CMP-2001-04512-1, "RES 10K OHM 1% 1/8W 0805", Manufacturer=Yageo, Part Number=RC0805FR-1010KL
R10: "180 kOhms Â±1% 0.125W, 1/8W Chip Resistor 0805 (2012 Metric) Automotive AEC-Q200, Moisture Resistant Thick Film", Package="2012 TE Connectivity", Check_prices=https://www.snapeda.com/parts/CRGCQ0805F180K/TE+Connectivity+Passive+Product/view-part/?ref=eda, MF="TE Connectivity", MP=CRGCQ0805F180K, SnapEDA_Link=https://www.snapeda.com/parts/CRGCQ0805F180K/TE+Connectivity+Passive+Product/view-part/?ref=snap
R15 R16: library part CMP-03412-042085-1, "Thin Film Chip Resistors Automotive Grade 100kΩ 0.1% 25ppm/°C 0805", Case/Package=0805, Max Operating Temperature=155°C, Max Power Dissipation=125mW, Min Operating Temperature=-55°C, Resistance=100kR, Resistor Type="Thin Film", Temperature Coefficient=25ppm/°C, Tolerance=0.1%, Features="Moisture Resistant", Height=0.024inch, Length=0.079inch, Number of Terminations=2, Packaging="Tape and Reel", RoHS Compliant=Yes, Series=AT, Width=0.049inch
S1 S2: "Tactile Switch SPST-NO Top Actuated Surface Mount", Package=None, Availability=Unavailable, MP=B3S-1000P, Price=None
U1: "WiFi Modules (802.11) (Engineering Samples) SMD module, ESP32-C3, 4MB SPI flash, PCB antenna, -40 C +85 C", Package=Package, Availability="In Stock", Check_prices=https://www.snapeda.com/parts/ESP32-C3-WROOM-02-N4/Espressif+Systems/view-part/?ref=eda, MF="Espressif Systems", MP=ESP32-C3-WROOM-02-N4, Price=None, Purchase-URL=https://pricing.snapeda.com/search/part/ESP32-C3-WROOM-02-N4/?ref=eda, SnapEDA_Link=https://www.snapeda.com/parts/ESP32-C3-WROOM-02-N4/Espressif+Systems/view-part/?ref=snap
U2: "1-cell, 1-A, Li-ion linear battery charger w/ 10kÎ© NTC", Package="HVSSOP-10 Texas Instruments", Check_prices=https://www.snapeda.com/parts/BQ24090DGQR/Texas+Instruments/view-part/?ref=eda, MF="Texas Instruments", MP=BQ24090DGQR, SnapEDA_Link=https://www.snapeda.com/parts/BQ24090DGQR/Texas+Instruments/view-part/?ref=snap
U3: "Circuit:SPDT Actuator Style:Rectangular Columnar Termination Style:PC Pin Length:8.8mm Width:3.9mm Switch Height:7.2mm Mounting Type:Through Hole Actuator Color:Black Operating Temperature:-35℃~+75℃ Operating Temperature:-35℃~+75℃", Actuator Color=Black, JLCPCB Part Class="Extended Part", LCSC Part Name=大型拨动开关, Manufacturer=SOFNG(硕方), ManufacturerPart=SS-12D00-G3, Operating Temperature=-35℃~+75℃, Actuator Style="Rectangular Columnar", AddInBom=yes, Circuit=SPDT, ConvertToPcb=yes, Datasheet=https://item.szlcsc.com/datasheet/SS-12D00-G3/23787622.html, FootprintName=SW-TH_3P-L8.8-W3.9-P2.50_SS12D00G3, Length=8.8mm, ModelId=73abde54055d465790e8480c42fb2657, ModelName=SW-TH_3P-L8.8-W3.9-P2.50_SS12D00G3, ModelTransform=346.495,153.54304,0,0,0,0,0,0,-102.362, Mounting Type="Through Hole", Supplier=LCSC, Supplier Footprint=插件-3P,8.8x3.9mm, SupplierPart=C22355741, Switch Height=7.2mm, Symbol=SS-12D00-G3, Termination Style="PC Pin", Width=3.9mm
U4: "High Efficiency Single Inductor Buck-Boost Converter with 4A Switch", Package="VSON-14 Texas Instruments", Check_prices=https://www.snapeda.com/parts/TPS63020DSJT/Texas+Instruments/view-part/?ref=eda, MF="Texas Instruments", MP=TPS63020DSJT, SnapEDA_Link=https://www.snapeda.com/parts/TPS63020DSJT/Texas+Instruments/view-part/?ref=snap
U5: "Capacitive Touch Buttons SOT-23-6", Package="SOT-23-6 Microchip", Check_prices=https://www.snapeda.com/parts/AT42QT1010-TSHR/Microchip/view-part/?ref=eda, MF=Microchip, MP=AT42QT1010-TSHR, SnapEDA_Link=https://www.snapeda.com/parts/AT42QT1010-TSHR/Microchip/view-part/?ref=snap

## Via types
v1: diameter 50/50/50/50 (per signal layer), hole 28, Top Layer to Bottom Layer, 30 vias

## Nets (pads, with @x,y where several pads share a name; then routed paths per layer and width w, separated by ;. In a path a pad name is that pad's centre, name@x,y a point inside that pad or via, vN(x,y) a via of type N, cw(c..) or ccw(c..) an arc to the next point about the centre after c; other vN are vias at no path point)
+5V: C4.2 J1.A4 J1.A9 J1.B4 J1.B9 U2.1 | length 587.5
  Top Layer w10: U2.1 4065.98,3554.25 4080,3540.24 4080,3540 ; 4266.73,3531.73 J1.A4 J1.B9 4353.58,3551.42 ; J1.A9 J1.B4 4348.58,3728.58 4368.72,3708.45
  Top Layer w35: 4080,3540 4131.54,3540 C4.2 4257.28,3541.18 4266.73,3531.73 ; 4353.58,3551.42 4368.72,3566.55 4368.72,3708.45
BAT_SENSE: R15.1 R16.2 U1.5 | length 1263.5
  Top Layer w10: v1(3320,4295) 3330.82,4295 3349.05,4313.23 3421.42,4313.23 U1.5@3436.06,4327.87 ; v1(3515,3555) 3464.45,3504.45 R16.2 R15.1
  Bottom Layer w10: v1(3320,4295) 3309.18,4295 3260,4245.82 3260,3810 v1(3515,3555)
BOOT: R11.2 S1.3 S1.4 U1.8 | length 1596
  Top Layer w10: S1.3 S1.4 3155.04,3881.5 3424.25,4150.71 U1.8@3436.06,4150.71 ; S1.4@2978.58,3886.42 3115,4022.83 3115,4418.5 3047.11,4486.4 3047.11,4495.26 3038.86,4503.5 R11.2
GND: C1.2 C2.1 C3.2 C4.1 C5.1 C6.1 C7.1 C8.2 C9.2 C10.1 C11.1 C12.2 C13.2 CN1.1 J1.3 J1.4 J1.5 J1.6 J1.A1 J1.A12 J1.B1 J1.B12 R3.2 R4.2 R5.2 R6.1 R7.1 R10.1 R16.1 S1.1 S1.2 S2.1 S2.2 U1.9 U1.19 U1.20 U1.21 U1.22 U1.23 U1.24 U1.25 U1.26 U1.27 U1.28 U1.29 U1.30 U1.31 U1.32 U1.33 U1.34 U1.35 U1.36 U1.37 U1.38 U1.39 U2.3 U2.7 U2.11 U3.3 U4.2 U4.15 U5.2 | length 7215
  Top Layer w10: S1.1 S1.2 S2.1@2801.42,4008.5 ; S2.1 S2.2 ; S2.2@2824.51,4349.51 2866.87,4349.51 C11.1@2927.44,4410.08 ; v1(2830,4410) C11.1@2922.44,4410 ; v1@2830,4420 2830,4550 2897.56,4617.56 C3.2 3302.1,4617.56 C2.1 ; 2850,3355 U5.2 ; C13.2@3224.77,3470.23 3304.77,3470.23 3335,3440 R16.1 ; U1.9@3436.06,4091.65 3436.06,4039.85 3472.64,4003.27 4026.73,4003.27 v1(4070,3960) R5.2 4066.02,3863.43 4034.09,3831.5 R6.1 ; R10.1@3598.19,2708.27 3598.19,2789.88 3520,2868.07 3520,2907.52 3556.26,2943.77 3557.3,2943.77 3588.98,2975.46 C10.1 3595,2980.46 3595,3140.82 3613.2,3159.02 U3.3 ; v1(3645,3645) 3645,3716.5 R7.1 ; 3710,2825 3724.72,2839.72 3724.72,2864.61 U4.2 U4.15@3725,2900.32 ; 3820,3637.9 3839.82,3618.09 3844.67,3618.09 3849.45,3613.31 U2.7 ; U2.11@3975.43,3570 3998.15,3592.72 4039.49,3592.72 U2.3 4103.62,3593.62 4124.61,3614.61 ; v1@4145,3640 v1(4145,3650) ; J1.B12 J1.A1 4327.72,3492.36 4332.5,3487.58 4337.35,3487.58 4342.62,3482.31 4342.62,3463.04 4340.31,3460.74 J1.3 ; J1.B1 J1.A12 4327.72,3787.64 4332.5,3792.42 4337.35,3792.42 4342.62,3797.69 4342.62,3816.96 4340.31,3819.26 J1.4 ; R3.2 v1(4500,3965) ; R4.2 4418.43,3320 v1(4520,3320)
  Top Layer w15: S1.1 2886.5,3568.5 v1(2985,3470) ; S2.1@2801.42,4008.5 S2.1 ; S2.2 2806.42,4331.42 S2.2@2824.51,4349.51 ; v1(2830,4410) 2835,4415 v1@2830,4420 ; C11.1@2922.44,4410 C11.1 C11.1@2927.44,4410.08
  Top Layer w30: R10.1 R10.1@3598.19,2708.27 ; 3640,2750.08 3640,2755
  Top Layer w35: S1.1 2801.42,3403.58 2850,3355 ; v1(2985,3470) 2985.23,3470.23 C13.2@3224.77,3470.23 ; R10.1@3598.19,2708.27 3640,2750.08 ; 3640,2755 3710,2825 ; C5.1 C4.1 4211.79,3486.06 4269.62,3428.24 4339.48,3428.24 J1.3 ; 3820,3637.9 v1(3820,3680) ; C7.1 C6.1 3900.94,3115 3905.94,3120 v1(3910,3120) 3994.4,3035.6 CN1.1 ; C9.2 C8.2 3841.5,2678.78 3845,2675.28 3845,2661.08 3842.7,2658.78 3842.7,2567.3 v1(3845,2565) ; 4124.61,3614.61 4124.61,3625.55 4145,3645.94 v1(4145,3650)
  Top Layer w40: J1.3 J1.5 4492.18,3427.4 4493.7,3425.87 4493.7,3349 4520,3322.71 v1(4520,3320) ; J1.4 J1.6 4467.48,3932.48 v1(4500,3965)
  other v1: 3595,3130
HEADER_1: J2.1 U1.15 | length 306.7
  Top Layer w10: U1.15 4219.58,4385 4334.53,4499.95 4334.53,4519.53 J2.1
HEADER_2: J2.2 U1.4 | length 1292.9
  Top Layer w10: v1(3320,4360) 3330.82,4360 3343.11,4372.28 3422.28,4372.28 U1.4 ; v1(4260,4370) 4267.65,4377.65 4292.65,4377.65 J2.2
  Bottom Layer w10: v1(3320,4360) 3450,4490 4040,4490 4160,4370 v1(4260,4370)
HEADER_3: J2.3 U1.6 | length 1323.2
  Top Layer w10: v1(3320,4230) 3328.22,4230 3352.4,4254.17 3422.28,4254.17 U1.6 ; v1(4260,4310) 4290,4340 J2.3
  Bottom Layer w10: v1(3320,4230) 3330,4230 3423.83,4323.83 3423.83,4338.83 3520,4435 3930,4435 4055,4310 v1(4260,4310)
HEADER_4: J2.4 U1.10 | length 478.5
  Top Layer w10: v1(4120,4010) 4120,4085.75 U1.10 ; v1(4260,4250) 4265,4245 4350,4245 J2.4
  Bottom Layer w10: v1(4120,4010) 4260,4150 v1(4260,4250)
NetC10_2: C10.2 U4.1 U4.13 | length 478.4
  Top Layer w10: C10.2 C10.2@3591.02,2904.54 ; U4.1 3630.67,2864.88 C10.2@3591.02,2904.54 ; U4.13 3725,3054.5 3704.5,3075 3670,3075 3654.37,3059.37 3654.37,2966.85 3623.74,2936.23 3622.7,2936.23 C10.2@3591.02,2904.54
NetC14_1: C14.1 R17.2 U5.3 | length 221.6
  Top Layer w10: R17.2 2893.5,3113.86 2904.54,3124.89 C14.1 2904.54,3265.46 2893.94,3276.06 U5.3
NetD1_1: D1.1 U2.8 | length 321.5
  Top Layer w10: D1.1 3715.12,3804.68 3770,3749.8 3770,3630 3806.38,3593.62 U2.8
NetD1_2: D1.2 R8.1 | length 99.2
  Top Layer w10: R8.1 D1.2
NetD2_1: D2.1 U2.5 | length 491.3
  Top Layer w10: D2.1 3712.72,3919.68 3937.4,3695 4015,3695 4054.56,3655.44 4054.56,3633.9 4053.65,3632.99 U2.5
NetD2_2: D2.2 R9.1 | length 96.3
  Top Layer w10: R9.1 3548.73,3923.62 D2.2
NetD3_1: D3.1 U4.14 | length 412.1
  Top Layer w10: D3.1 v1(3450,3060) ; v1(3690,3040) 3690,3029.18 3705.32,3013.86 U4.14
  Bottom Layer w10: v1(3450,3060) 3556.17,3060 3576.17,3040 v1(3690,3040)
NetD3_2: D3.2 R1.1 | length 104.2
  Top Layer w10: R1.1 D3.2
NetJ1_A5: J1.A5 R4.1 | length 516
  Top Layer w10: v1(4200,3595) 4208.77,3595 4232.67,3571.1 J1.A5 ; v1(4240,3320) 4331.57,3320 R4.1
  Bottom Layer w10: v1(4200,3595) 4200,3360 v1(4240,3320)
NetJ1_B5: J1.B5 R3.1 | length 318.8
  Top Layer w10: J1.B5 4304.09,3689.21 4299.31,3693.99 4294.46,3693.99 4281.12,3707.34 4281.12,3915.57 4326.57,3961.02 R3.1
NetL1_1: L1.1 U4.8 U4.9 | length 169.8
  Top Layer w10: U4.9 U4.8 3849.88,2975.12
  Top Layer w35: 3849.88,2975.12 3857.37,2975.12 3865.84,2966.65 L1.1
NetL1_2: L1.2 U4.6 U4.7 | length 169.8
  Top Layer w10: U4.6 3849.88,2864.88
  Top Layer w35: 3849.88,2864.88 3857.37,2864.88 3865.84,2873.35 L1.2
NetR5_1: R5.1 U2.2 | length 378.2
  Top Layer w10: U2.2 4128.43,3573.94 4190,3635.5 4190,3666.57 4094.69,3761.88 4094.69,3765.86 4073.98,3786.57 R5.1
NetR6_2: R6.2 U2.4 | length 281.3
  Top Layer w10: R6.2 3973.86,3768.5 4022.36,3720 4050,3720 4098.11,3671.89 4098.11,3627.11 4085.22,3614.21 4041.3,3614.21 U2.4
NetR7_2: R7.2 U2.9 | length 265.9
  Top Layer w10: R7.2 3711.5,3648.5 3786.06,3573.94 U2.9
NetR13_1: R13.1 U1.7 | length 224.6
  Top Layer w10: R13.1 3393.86,4178.5 3421.99,4206.63 U1.7@3432.93,4206.63
NetR14_1: R14.1 U1.16 | length 101.3
  Top Layer w10: U1.16 4224.45,4444.06 R14.1
REG_EN: U3.2 U4.12 | length 308.6
  Top Layer w10: U3.2 3711.6,3135.6 3744.69,3102.52 U4.12
REG_FB: R2.1 R10.2 U4.3 | length 329.2
  Top Layer w10: R2.1 3622.28,2615.71 3622.28,2642.2 3671.81,2691.73 3671.81,2741.81 3744.69,2814.69 U4.3
REG_VIN: C5.2 C6.2 C7.2 CN1.2 R8.2 R9.2 R15.2 U2.10 U3.1 U4.10 U4.11 | length 2080.9
  Top Layer w10: R8.2 3466.9,3811.22 R9.2 ; 3778.29,3008.29 3778.29,2995.57 3764.37,2981.65 U4.11 U4.10 ; C5.2 3805.79,3554.25 U2.10
  Top Layer w35: R8.2 3473.47,3799.46 3473.47,3711.53 3643.82,3541.18 C5.2 ; R15.2@3664.45,3435 3669.45,3440 3760,3440 3810,3390 U3.1 ; R15.2@3664.45,3445 3670.73,3451.28 3675.73,3451.28 3761.48,3537.03 ; 3778.29,3008.29 3778.29,3035.85 C7.2 C6.2 3786.59,3119.15 3786.59,3194.07 3805.22,3212.7 3805.22,3265.22 U3.1 ; CN1.2 4105.6,3114.4 3950,3270 U3.1
REG_VOUT: C1.1 C2.2 C3.1 C8.1 C9.1 C12.1 C13.1 R1.2 R2.2 R11.1 R12.1 R13.2 R14.2 U1.1 U4.4 U4.5 U5.5 U5.6 | length 2876.6
  Top Layer w10: R12.1 R11.1 ; U5.5 U5.6 3027.4,3392.4 ; R11.1@3033.25,4563.25 v1@3126.75,4563.25 ; v1@3131.22,4561.22 3213.78,4561.22 3220,4555 R13.2 ; C3.1 C2.2@3317.9,4562.44 ; C2.2@3320.44,4564.09 U1.1@3436.06,4564.09 ; U4.4 U4.5 3784.06,2840.94 ; R14.2 v1(4225,4575)
  Top Layer w15: R11.1 R11.1@3033.25,4563.25 ; v1@3126.75,4563.25 v1(3130,4560) v1@3131.22,4561.22
  Top Layer w35: 3027.4,3392.4 3034.54,3399.54 C12.1 C13.1 ; C13.1@3226.02,3399.54 3238.13,3387.42 3238.13,3386.4 3280,3344.54 3280,2872.56 3412.31,2740.25 3419.22,2740.25 3447.88,2711.58 R1.2 3450,2520 3475,2495 3635,2495 3670.22,2530.22 3670.22,2586.79 R2.2 ; R2.2@3678.43,2598.98 3715.37,2635.93 3777.3,2635.93 3778.5,2637.13 C1.1 ; v1(3765,2580) 3765,2584.06 3777.3,2596.36 3777.3,2643.8 C1.1 ; 3779.7,2836.59 3779.7,2786.2 C9.1 C8.1 C1.1
RESET: C11.2 R12.2 S2.3 S2.4 U1.2 | length 995.3
  Top Layer w10: R12.2 2950,4465.26 2968.41,4446.85 2968.41,4429.15 C11.2 ; S2.3 S2.4 2982.56,4327.52 C11.2 ; v1(3050,4415) C11.2 ; v1(3265,4465) 3272.65,4472.65 3302.12,4472.65 3314.47,4485 3405.25,4485 3414.04,4493.79 3414.04,4494.82 3424.25,4505.04 U1.2@3436.06,4505.04
  Bottom Layer w10: v1(3050,4415) 3215,4415 v1(3265,4465)
TOUCH_OUT: U1.3 U5.1 | length 1345.6
  Top Layer w10: U5.1 2895,3393.46 v1(2895,3460) ; v1(3270,4395) 3308.27,4433.27 3423.35,4433.27 U1.3@3436.06,4445.98
  Bottom Layer w10: v1(2895,3460) 3195,3760 3195,4320 v1(3270,4395)
TOUCH_PAD: R17.1 | length 181.5
  Top Layer w10: 2956.5,2923.5 R17.1
TOUCH_SNS: C14.2 U5.4 | length 112
  Top Layer w10: C14.2 2986.06,3220.6 U5.4
USB_D_N: J1.A7 J1.B7 U1.13 | length 928.4
  Top Layer w9.59: U1.13@4125.04,4268.82 4136.85,4268.82 4149.77,4255.9 4149.77,4255.49 4155.39,4249.87 4180.76,4249.87 4205,4225.63 4205,4180 4205,4175.2 4225,4175.2 4225,4145.61 4203.59,4145.61 4203.59,4116.02 4225,4116.02 4225,4086.42 4203.59,4086.42 4203.59,4056.83 4225,4056.83 4225,4027.24 4203.59,4027.24 4203.59,3997.64 4205.14,3997.64 4205.14,3968.05 4205,3968.05 4205,3910 4205,3748.06 4283.6,3669.46 4315.83,3669.46 J1.A7 4327.72,3669.53 4332.7,3664.54 4337.27,3664.54 4342.42,3659.39 4342.42,3640.29 4333.39,3631.27 4317.01,3631.27 J1.B7
USB_D_P: J1.A6 J1.B6 U1.14 | length 928.4
  Top Layer w9.59: U1.14@4125.04,4327.87 4113.23,4327.87 4100.31,4314.95 4100.31,4303.77 4086.72,4290.18 4086.72,4247.46 4097.9,4236.28 4175.13,4236.28 4190,4221.41 4190,3743.83 4277.97,3655.86 4293.51,3655.86 4294.55,3654.83 4299.11,3654.83 J1.B6@4304.09,3649.84 ; J1.A6 4304.09,3610.47 4299.11,3615.46 4294.55,3615.46 4289.39,3620.61 4289.39,3639.71 4294.55,3644.86 4299.11,3644.86 J1.B6@4304.09,3649.84 ; J1.B6 J1.B6@4304.09,3649.84
pads on no net: J1.1 J1.2 J1.A8 J1.B8 U1.11 U1.12 U1.17 U1.18 U2.6 U2.12 U2.13 U2.14 U2.15 U2.16 U4.16 U4.17 U4.18 U4.19 U4.20 U4.21 U4.22 U4.23 U4.24 U4.25 U4.26 U4.27 U4.28 U4.29 U4.30

## Polygon pours and split planes (outlines as drawn)
GND on Mid Layer 1 "GND_L02_P000" (solid, pour order 0): 2750,4800 2850,4900 4450,4900 4550,4800 4550,2600 4450,2500 2850,2500 2750,2600
REG_VOUT on Mid Layer 2 "REG_VOUT_L03_P001" (solid, pour order 1): 4450,4900 4550,4800 4550,2600 4450,2500 2850,2500 2750,2600 2750,4800 2850,4900

## Keep-outs
Keep-Out Layer:
  region: 2720,3045 2720,2465 3250,2465 3250,3045

## Other copper
Top Layer:
  region net TOUCH_PAD: 3155,2951.85 3155,2558.15 2761.3,2558.15 2761.3,2951.85

## Silkscreen, mask and mechanical layers (free items; w line width, h text height)
Top Overlay:
  drawing of 694 lines, arcs and shapes, not listed
  text "IO3" at 4460,4535 h40
  text "IO5" at 4460,4435 h40
  text "IO7" at 4460,4335 h40
  text "RESET" at 3035,4265 h40 r270
  text "IO10" at 4435,4235 h40
  text "BOOT" at 3035,3815 h40 r270
  text "CHARGER" at 3265,3660 h40 r90
  text "TOUCH" at 3060,3560 h40
  text "+" at 4235,3150 h60
  text "-" at 4235,2955.01 h60
  text "REG" at 3240,2760 h40 r90
  text "3.3V" at 3240,2560 h40 r90
Mechanical 1:
  lines w10: 2300,4985 4940,4985 4940,5940 2300,5940 2300,4985
  text "TODO: / 1) Figure out through hole JST-PH and switch /  / 2)  Figure out GND stitching /  / 3)  Change LED colors /  / 4) Add GPIO headers" at 2340,5095 h60